# Altium PCB traffic_light_PCB - 1 layer.PcbDoc
Units mil, origin at the board's own origin, x right, y up, seen from the top; angles counter-clockwise.
Board outline 6000 x 4000 mil, 2 copper layers (Top Layer, Bottom Layer); 27 components, 45 nets, 189 pads, 0 vias.
Unrouted connection lines stored in the file: 3.
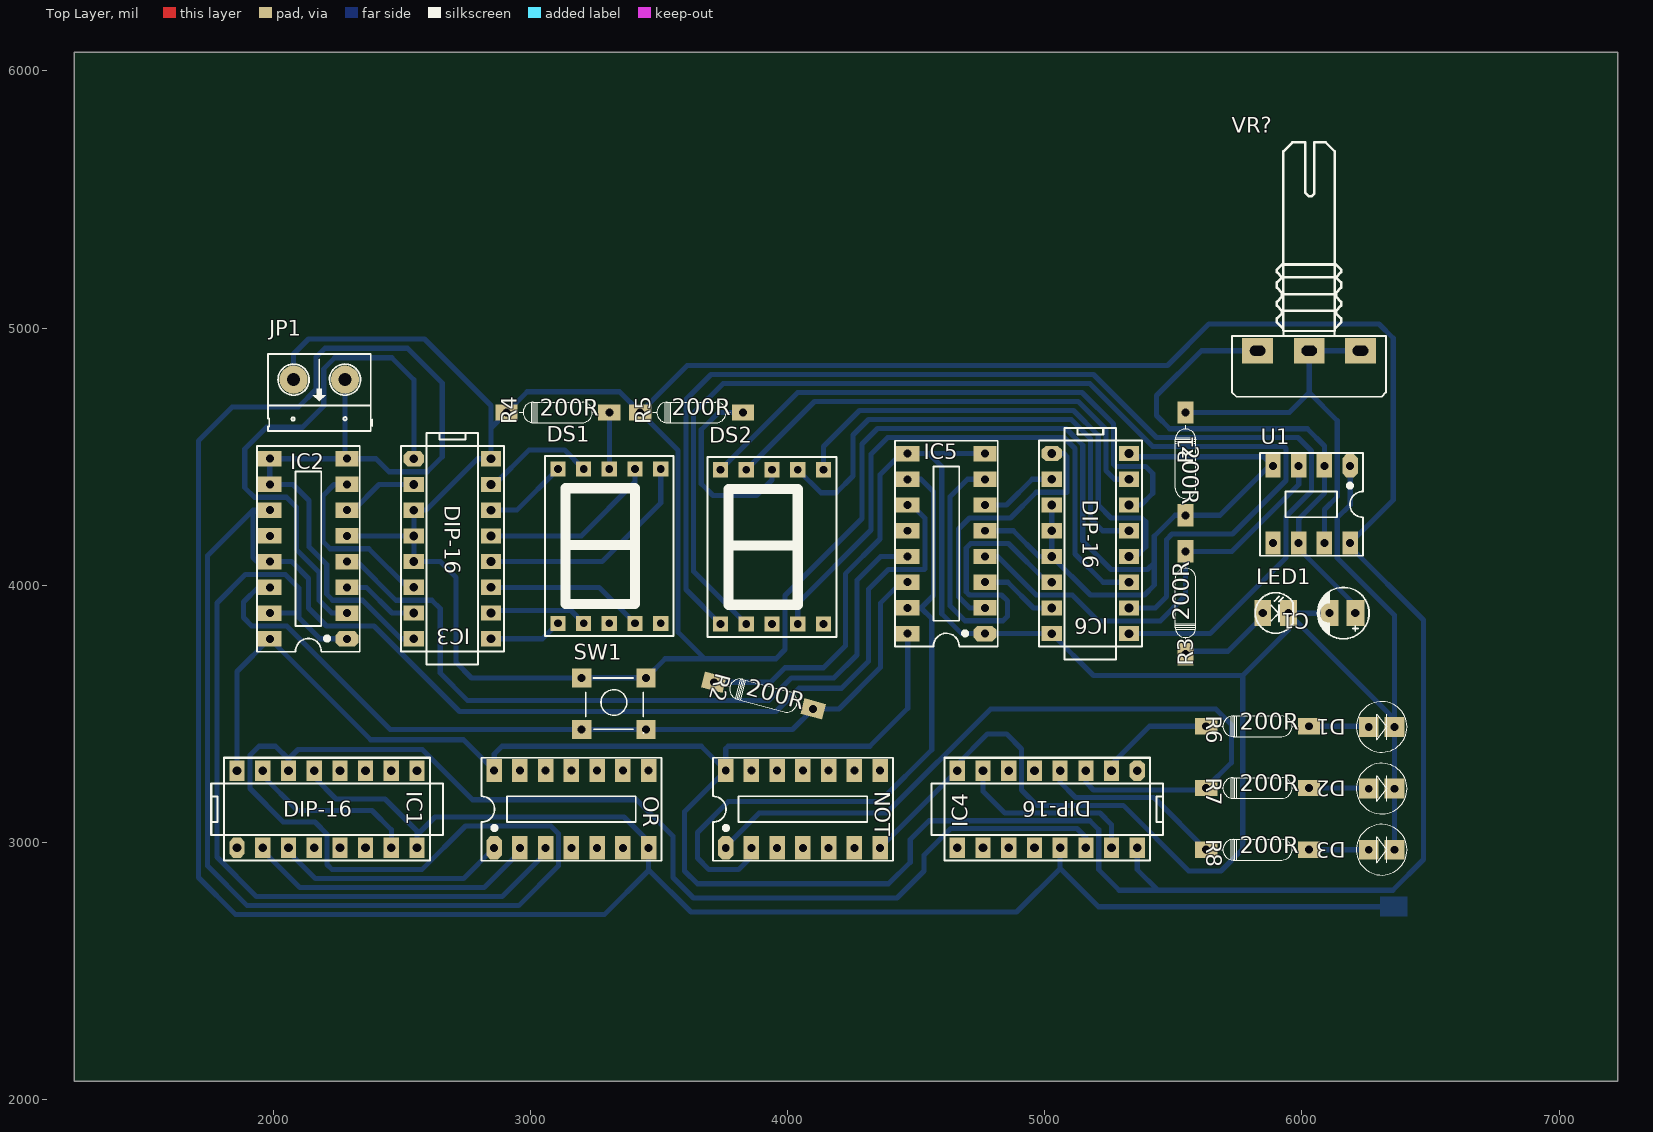
[diagram p0: Top Layer view]
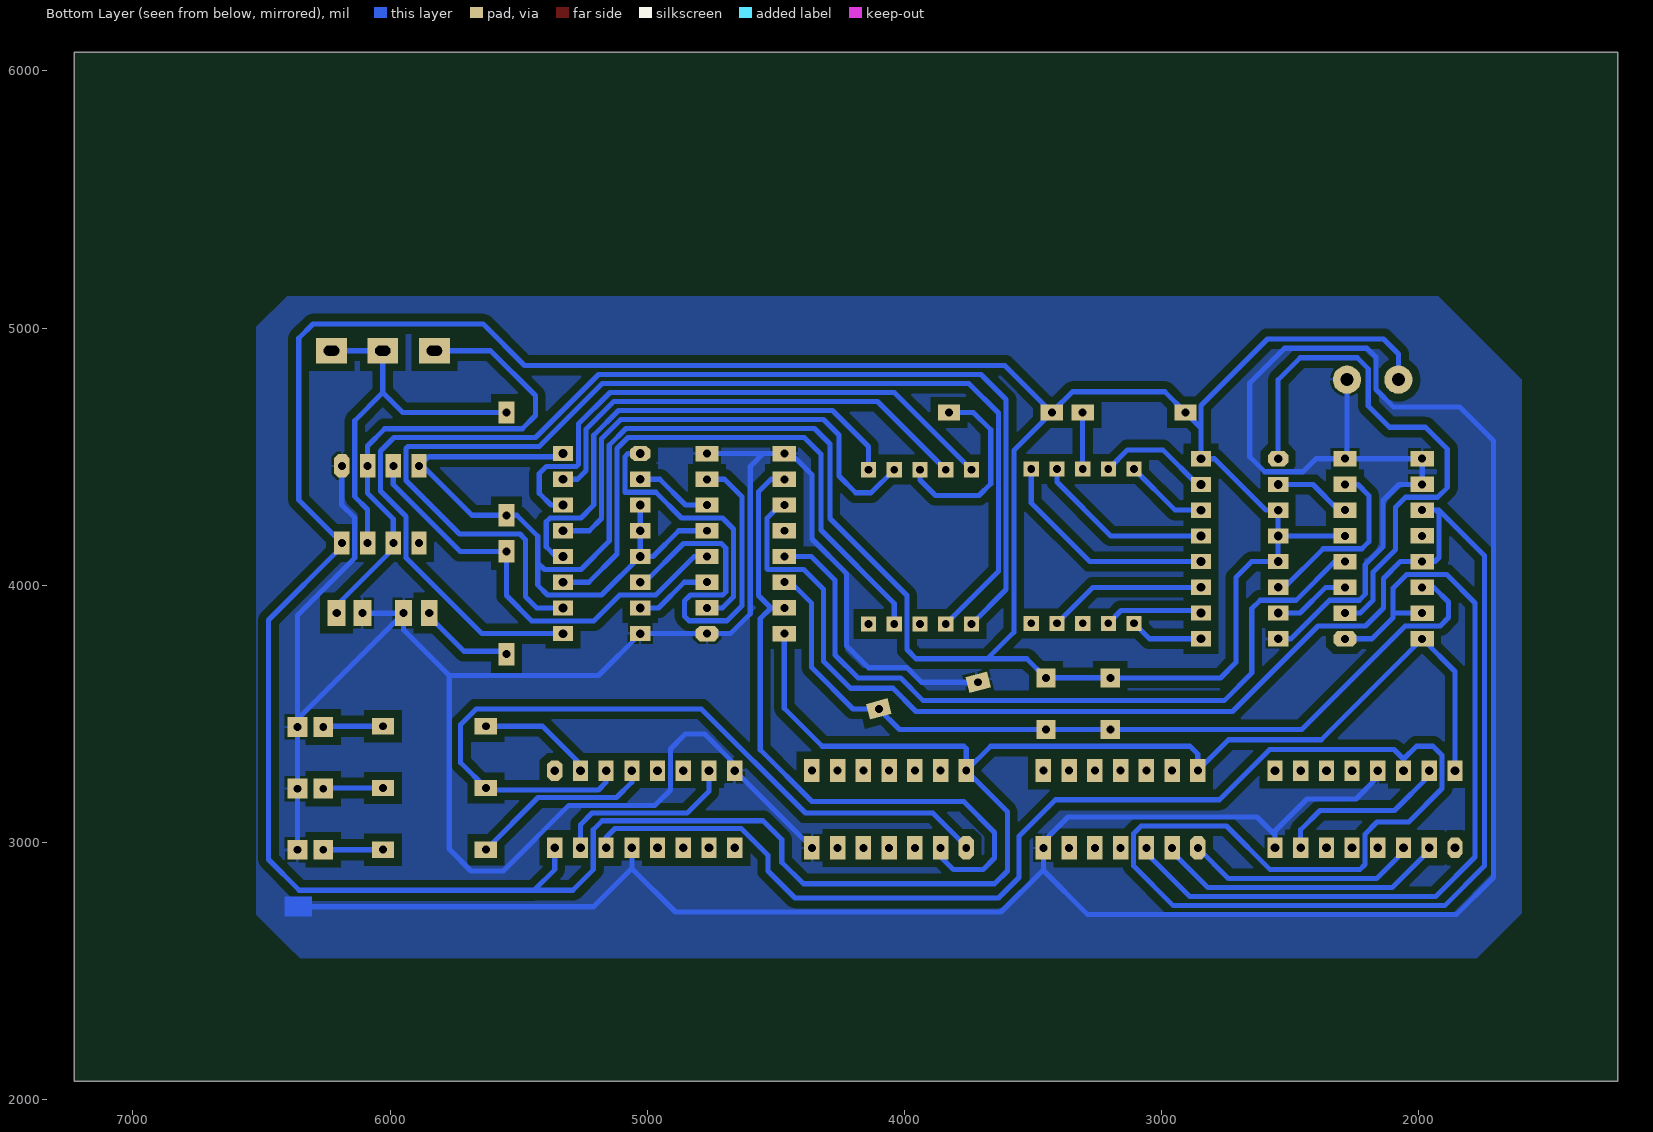
[diagram p1: Bottom Layer view, seen from below]
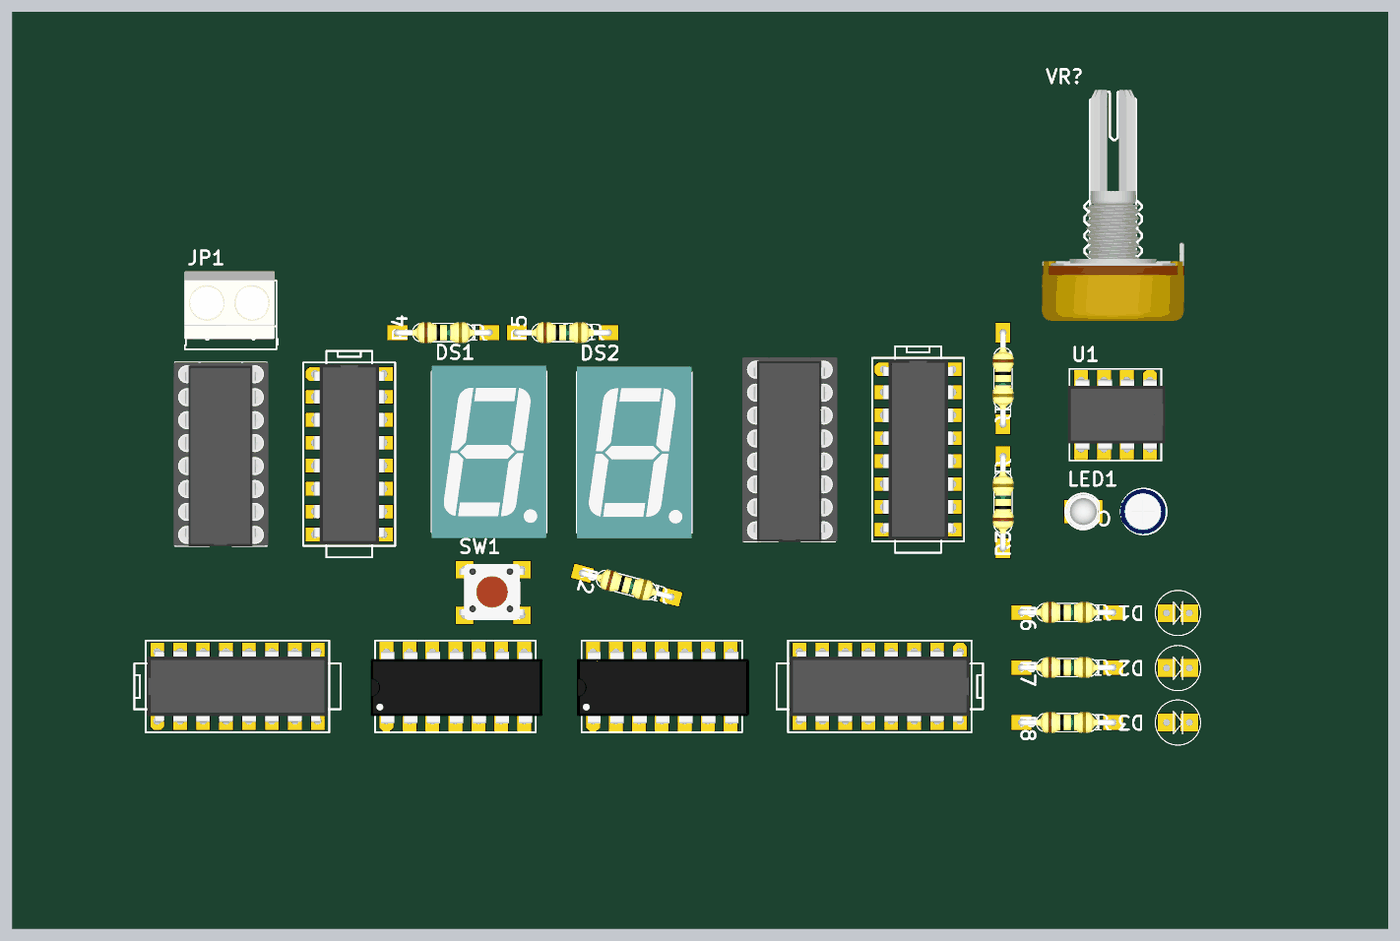
[diagram p2: 3D render of the assembled board from above, using the file's embedded part models]

## Layer stack, top to bottom
Top Solder: solder mask 0.4, Solder Resist, Dk 3.5
Top Layer: signal copper 1.4
Dielectric 1: dielectric 12.6, FR-4, Dk 4.8
Bottom Layer: signal copper 1.4
Bottom Solder: solder mask 0.4, Solder Resist, Dk 3.5

## Board outline
1227.5,2072.5 7227.5,2072.5 7227.5,6072.5 1227.5,6072.5

## Design rules (kind name [scope] priority, off if disabled: settings)
Clearance [All] p1: gap=10
PolygonConnect [All] p1: connectstyle=Relief reliefconductorwidth=10 reliefentries=4 polygonreliefangle="90 Angle" airgapwidth=10
RoutingLayers [All] p1: top layer_v5=FALSE bottom layer_v5=TRUE
RoutingVias [All] p1: holewidth=28 width=50 viastyle="Through Hole" minholewidth=28 minwidth=50 maxholewidth=28 maxwidth=50
SolderMaskExpansion [All] p1: expansion=4
Width [All] p1: maxlimit=30 minlimit=12 preferedwidth=20 toplayer_minwidth=20 minimp=50.000000 maximp=50.000000 favimp=50.000000
29 further rules are at their usual default settings.

## Components (designator, comment, footprint, x,y, rotation, side; value= is the part's Value field where it differs from the comment)
C1 "Cap Pol" CP1/2 6207.5,3892.5 r180 top
D1 "LED-RED-5MM" LED-5MM-RED 6260,3450 r0 top
D2 "LED-YELLOW-5MM" LED-5MM-YELLOW 6260,3210 r0 top
D3 "LED-GREEN-5MM" LED-5MM-GREEN 6260,2972.5 r0 top
DS1 "7SEG-A" LED7SEG 3306.5,4152.5 r0 top
DS2 "7SEG-A" LED7SEG 3939,4150 r0 top
IC1 "4017" DIP16 2210.29,3130.08 r0 top
IC2 "74193" DIP16/W0.3 2287.5,3792.5 r90 top
IC3 "7447" DIP16 2697.58,4142.21 r270 top
IC4 "4017" DIP16 5009.71,3129.92 r180 top
IC5 "74193" DIP16/W0.3 4767.5,3812.5 r90 top
IC6 "7447" DIP16 5177.58,4162.21 r270 top
JP1 "Header 2_1" HED2 2280,4800 r180 top
LED1 "LED" LED-3MM-WHITE 5847.5,3892.5 r0 top
NOT "7404" DIP14/W0.3 3760,2980 r0 top
OR "7432" DIP14/W0.3 2860,2980 r0 top
R1 "R0.4W" "DIEN TRO 1/4 W" 5547.5,4672.5 r270 top
R2 "R0.4W" "DIEN TRO 1/4 W" 3713.63,3623.53 r345 top
R3 "R0.4W" "DIEN TRO 1/4 W" 5547.5,3732.5 r90 top
R4 "R0.4W" "DIEN TRO 1/4 W" 2907.5,4672.5 r0 top
R5 "R0.4W" "DIEN TRO 1/4 W" 3427.5,4672.5 r0 top
R6 "R0.4W" "DIEN TRO 1/4 W" 5627.5,3452.5 r0 top
R7 "R0.4W" "DIEN TRO 1/4 W" 5627.5,3212.5 r0 top
R8 "R0.4W" "DIEN TRO 1/4 W" 5627.5,2972.5 r0 top
SW1 "SW" SW4 3200,3640 r0 top
U1 "NE555" DIP8 6042.5,4315 r180 top
VR? "50K" VR-S1 6027.5,4912.5 r180 top

## Footprints (in the part's own frame and the unit in brackets; to place one, negate y for a bottom-side part, rotate by r counter-clockwise, add the part's x,y. Pads: shape width x height; smd on the part's side, far side on the other; paste and mask are expansions set on the pad)
CP1/2 [mil] "Tu hoa < 22uF/16>50V"
  rect 70x100 hole 32: 1(0,0) 2(100,0)
  silkscreen extent -53,-100 147,100, body extent -49,-99 149,99, height 287
"DIEN TRO 1/4 W" [mm]
  rect 2.2x1.6 hole 0.787: 1(0,0) 2(10.16,0)
  silkscreen extent 1.26,-1.02 8.88,1.02, body extent -0.3,-1.16 10.46,1.16, height 2.93
DIP8 [mil] "DIP, 8-Leads, Row Spacing 7.62mm, Pitch 2.54mm, Body 9.91x6.73mm"
  oct 60x90 hole 31: 1(-145,-150)
  rect 60x90 hole 31: 2(-45,-150) 3(55,-150) 4(155,-150) 5(155,150) 6(55,150) 7(-45,150) 8(-145,150)
  silkscreen extent -195,-200 205,200, body extent -213,-153 213,153, height 177
DIP14/W0.3 [mil] "14PIN, W 300mil, Pin to pin 100mil"
  oct 60x90 hole 31: 1(0,0)
  rect 60x90 hole 31: 2(100,0) 3(200,0) 4(300,0) 5(400,0) 6(500,0) 7(600,0) 8(600,300) 9(500,300) 10(400,300) 11(300,300) 12(200,300) 13(100,300) 14(0,300)
  silkscreen extent -50,-50 650,350, body extent -70,-12 680,302, height 145
DIP16 [mm]
  oct 1.5x2 hole 0.864: 1(-8.897,-3.812)
  rect 1.5x2 hole 0.864: 2(-6.357,-3.812) 3(-3.817,-3.812) 4(-1.277,-3.812) 5(1.263,-3.812) 6(3.803,-3.812) 7(6.343,-3.812) 8(8.883,-3.812) 9(8.883,3.808) 10(6.343,3.808) 11(3.803,3.808) 12(1.263,3.808) 13(-1.277,3.808) 14(-3.817,3.808) 15(-6.357,3.808) 16(-8.897,3.808)
  silkscreen extent -11.44,-5.08 11.42,5.08, body extent -10,-3.93 10,3.94, height 1.99
DIP16/W0.3 [mil] "16 PIN, W 300mil, Pin to pin 100mil"
  oct 60x90 hole 31: 1(0,0)
  rect 60x90 hole 31: 2(100,0) 3(200,0) 4(300,0) 5(400,0) 6(500,0) 7(600,0) 8(700,0) 9(700,300) 10(600,300) 11(500,300) 12(400,300) 13(300,300) 14(200,300) 15(100,300) 16(0,300)
  silkscreen extent -50,-50 750,350, body extent -52,-57 752,356, height 299
HED2 [mil] "Header 2, 2 pin, hight 300mil, Pin to Pin 200, Colour Green"
  round 110 hole 50: 1(0,0) 2(200,0)
  silkscreen extent -106,-100 300,200, body extent -92,-140 302,155, height 394
LED7SEG [mil] "LED7SEG"
  round 60 on Top Overlay: 0(186,-210)
  rect 59.06x59.06 hole 30: 1(-199,-300) 2(-99,-300) 3(1,-300) 4(101,-300) 5(201,-300) 6(201,300) 7(101,300) 8(1,300) 9(-99,300) 10(-199,300)
  silkscreen extent -249,-350 251,350, body extent -250,-375 250,375, height 316
LED-3MM-WHITE [mil] "LED 2 PIN, 3ly Only colour"
  rect 65x100 hole 32: 1(0,0) 2(100,0)
  silkscreen extent -29,-78 118,79, body extent -25,-75 113,75, height 217
LED-5MM-GREEN [mil]
  rect 77x77 hole 30: A(0,0) K(100,0)
  silkscreen extent -48,-98 148,98, body extent -54,-105 155,105, height 370
LED-5MM-RED [mil]
  rect 77x77 hole 30: A(0,0) K(100,0)
  silkscreen extent -48,-98 148,98, body extent -54,-105 155,105, height 370
LED-5MM-YELLOW [mil]
  rect 77x77 hole 30: A(0,0) K(100,0)
  silkscreen extent -48,-98 148,98, body extent -54,-105 155,105, height 370
SW4 [mil] "SW button 4pin, 250 x250 mil"
  rect 75x75 hole 31: 1(0,0) 2(250,-200) 3(250,0) 4(0,-200)
  silkscreen extent 15,-215 240,0, body extent -36,-220 276,24, height 276
VR-S1 [mil]
  rect 120x100 hole 40 slot 60 at 0 deg: 1(-200,0) 2(-1,0) 3(200,0)
  silkscreen extent -299,-810 300,179, body extent -310,-818 310,188, height 839

## Part data
C1: "Polarized Capacitor (Radial)"
DS1 DS2: library part LED7SEG-A, "14.2 mm General Purpose Blue 7-Segment Display: CA, RH DP, Gray Surface"
IC1 IC4: "Decade Counter/Divider with 10 Decoded Outputs"
IC2 IC5: "Synchronous 4-Bit Up/Down Counter"
IC3 IC6: "BCD to 7-Segment Decoder/Driver"
JP1: "Header, 2-Pin"
LED1: "LED Single colour Green and Red"
NOT: "Hex Inverter"
OR: "Quad 2-Input OR Gate"
R1 R2 R3 R4 R5 R6 R7 R8: library part "Res 1/4 W", "Resistor"
SW1: library part SW4-1, "Switch button 4 pin"
U1: "TIMER IC"
VR?: library part VR-S, "Var Resistor"

## Nets (pads, with @x,y where several pads share a name; then routed paths per layer and width w, separated by ;. In a path a pad name is that pad's centre, name@x,y a point inside that pad or via, vN(x,y) a via of type N, cw(c..) or ccw(c..) an arc to the next point about the centre after c; other vN are vias at no path point)
GND: C1.2 D1.K D2.K D3.K IC1.8 IC1.13 IC2.8 IC2.9 IC2.10 IC3.8 IC4.8 IC4.13 IC5.1 IC5.8 IC5.9 IC6.8 JP1.1 LED1.2 NOT.7 OR.7 R2.1 U1.1 | length 20938
  Bottom Layer w20: IC1.13 2160,3255 2245,3170 2435,3170 2560,3045 2560,3030 ; JP1.1 IC2.8@2280,4492.5 ; IC3.8 2497.5,3792.5 2347.5,3942.5 2232.5,3942.5 2209,3966 2209,4081 2140,4150 2140,4330 2077.5,4392.5 IC2.10 IC2.9 IC2.8@2280,4492.5 ; IC1.8 2560,3030 ; R2.1 3933.53,3623.53 3990,3680 4140,3680 4225,3765 4225,4045 4360,4180 4360,4430 4442.5,4512.5 IC5.9 4550,4512.5 ; NOT.7 IC4.8 4660,3305 4777,3422 4852,3422 4910,3364 4910,3205 4970,3145 5305,3145 5560,2890 5685,2890 5770,2975 5770,3650 ; IC5.8 4550,4512.5 ; IC4.13 5060,2900 ; C1.2 6107.5,3892 LED1.2@5948,3892 ; U1.1 6187.5,4313 6137.5,4263 6137.5,4106.5 6360,3884 D1.K@6360,3480 ; 6322,2751 5209,2751 5060,2900 ; D3.K D2.K D1.K D1.K@6360,3480 ; IC2.8@2280,4492.5 IC2.8 2400.53,4492.5 2451,4442.03 2600,4442.03 2658,4500.03 2658,4787 2523,4922 2202,4922 2167,4887 2167,4762 2098,4693 1841,4693 1710,4562 1710,2865 1855,2720 3288,2720 3460,2892 3460,2895 ; 2560,3030 2630,3100 3365,3100 3460,3005 OR.7 3460,2895 ; 3460,2895 3625,2730 4890,2730 5060,2900 ; 4550,4512.5 4600,4462.5 4600,3890 4677.5,3812.5 IC5.1 IC6.8 5190,3650 5770,3650 ; 5770,3650 5947.5,3827.5 LED1.2 LED1.2@5948,3892 ; LED1.2@5948,3892 D1.K@6360,3480
NetC1_1: C1.1 U1.2 U1.6 VR?.3 | length 2032.4
  Bottom Layer w20: VR?.3 5609.5,4912.5 5435,4738 5435,4660 5486,4609 6021,4609 6087.5,4542.5 U1.2 6087.5,4358.64 5987.5,4258.64 U1.6 5987.5,4142.5 6197.5,3932.5 6207.5,3932.5 C1.1
NetD1_A: D1.A R6.2 | length 232.5
  Bottom Layer w20: R6.2 D1.A@6260,3452.5
NetD2_A: D2.A R7.2 | length 232.5
  Bottom Layer w20: R7.2 D2.A@6260,3212.5
NetD3_A: D3.A R8.2 | length 232.5
  Bottom Layer w20: R8.2 D3.A
NetDS1_1: DS1.1 IC3.9 | length 284.9
  Bottom Layer w20: IC3.9 3047.5,3792.5 DS1.1
NetDS1_2: DS1.2 IC3.10 | length 390
  Bottom Layer w20: IC3.10 2847.5,3902.03 3157.97,3902.03 DS1.2
NetDS1_3: DS1.3 DS1.8 R4.2 | length 220
  Bottom Layer w20: DS1.8 R4.2
NetDS1_4: DS1.4 IC3.11 | length 618
  Bottom Layer w20: IC3.11 3267.5,3992.5 DS1.4
NetDS1_6: DS1.6 IC3.12 | length 886.5
  Bottom Layer w20: IC3.12 3279.53,4092.5 3507.5,4320.47 DS1.6
NetDS1_7: DS1.7 IC3.13 | length 697.6
  Bottom Layer w20: IC3.13 3198.5,4192.5 3407.5,4401.5 DS1.7
NetDS1_9: DS1.9 IC3.15 | length 446.6
  Bottom Layer w20: IC3.15 2861.5,4392.5 2996,4527 3133,4527 DS1.9
NetDS1_10: DS1.10 IC3.14 | length 326.3
  Bottom Layer w20: IC3.14 2947.5,4292.5 DS1.10
NetDS2_1: DS2.1 IC6.9 | length 4712.6
  Bottom Layer w20: DS2.1@3739,3850 3605,3984.01 3605,4722.32 3702.68,4820 5190,4820 5435,4575 5985,4575 6037.5,4522.5 6037.5,4367.5 5937.5,4267.5 5937.5,4107.5 5642.5,3812.5 IC6.9
NetDS2_2: DS2.2 IC6.10 | length 4432.9
  Bottom Layer w20: DS2.2@3845,3855 3835,3855 3635,4055 3635,4670 3750,4785 5175,4785 5420,4540 5930,4540 5937.5,4532.5 5937.5,4407.5 5730,4200 5495,4200 5474,4179 5474,3956.5 5430,3912.5 IC6.10
NetDS2_3: DS2.3 DS2.8 R5.2 | length 759
  Bottom Layer w20: R5.2 3732.5,4672.5 3665,4605 3665,4395 3710,4350 3880,4350 3940,4410 DS2.8
NetDS2_4: DS2.4 IC6.11 | length 2280.6
  Bottom Layer w20: DS2.4 4040,3930 4325,4215 4325,4510 4390,4575 5075,4575 5117.86,4532.14 5117.86,4122.14 5227.5,4012.5 IC6.11
NetDS2_6: DS2.6 IC6.12 | length 1917
  Bottom Layer w20: DS2.6 4140,4540 4280,4680 5112,4680 5207.86,4584.14 5207.86,4312.14 5257.5,4262.5 5377.5,4262.5 5392.5,4247.5 5392.5,4150 5355,4112.5 IC6.12
NetDS2_7: DS2.7 IC6.13 | length 1897.2
  Bottom Layer w20: DS2.7 4130,4360 4190,4360 4255,4425 4255,4585 4315,4645 4405,4645 5103,4645 5177.86,4570.14 5177.86,4260.3 5225.66,4212.5 IC6.13
NetDS2_9: DS2.9 IC6.15 | length 1836.9
  Bottom Layer w20: DS2.9@3860,4450 3840,4470 3860,4470 4105,4715 5130,4715 5237.86,4607.14 5237.86,4446.14 5271.5,4412.5 IC6.15
NetDS2_10: DS2.10 IC6.14 | length 2215.3
  Bottom Layer w20: DS2.10 4040,4750 5145,4750 5268,4627 5268,4469.5 5274.53,4462.97 5392.03,4462.97 5420,4435 5420,4358 5374.5,4312.5 IC6.14
NetIC1_2: IC1.2 OR.2 | length 1143.1
  Bottom Layer w20: IC1.2 1960,2970 2105,2825 2820,2825 2960,2965 OR.2
NetIC1_3: IC1.3 OR.1 | length 908.2
  Bottom Layer w20: IC1.3 2060,2965 2165,2860 2740,2860 OR.1
NetIC1_7: IC1.7 IC1.15 | length 677
  Bottom Layer w20: IC1.15 1960,3260 2095,3125 2385,3125 2460,3050 IC1.7
NetIC1_14: IC1.14 IC2.11 IC2.13 IC4.14 IC5.11 | length 12428.8
  Bottom Layer w20: IC2.11 1934,4292.5 ; IC1.14 2060,3325 ; IC5.11 4483.5,4312.5 4535,4261 4535,4065 4532.5,4062.5 4392.5,4062.5 4315,3985 4315,3705 4210,3600 4045,3600 3955,3510 2725,3510 2392.5,3842.5 2207.5,3842.5 2138,3912 2138,4027 2072.5,4092.5 IC2.13 1937.5,4092.5 1921.97,4108.03 1921.97,4280.47 1934,4292.5 ; IC4.14 5160,3020 5125,3055 4635,3055 4531,2951 4531,2890 4426,2785 3635,2785 3555,2865 3555,3025 3413,3167 2775,3167 2580,3362 2097,3362 2060,3325 ; 1934,4292.5 1922,4292.5 1745,4115.5 1745,2910 1900,2755 2955,2755 3110,2910 3110,3035 3080,3065 2748,3065 2578,2895 2230,2895 2210,2915 2210,3033 2163,3080 2040,3080 1910,3210 1910,3340 1945,3375 2010,3375 2060,3325
NetIC2_1: IC2.1 IC2.15 OR.3 | length 3255.9
  Bottom Layer w20: IC2.15 2101,3892.5 ; IC2.1 2182.5,3792.5 2101,3874 2101,3892.5 ; OR.3 3060,2960 2890,2790 1936,2790 1781.96,2944.04 1781.96,3931.96 1892.5,4042.5 2047.5,4042.5 2101,3989 2101,3892.5
NetIC2_2: IC2.2 IC3.1 | length 2142.1
  Bottom Layer w20: IC2.2 2228,3892.5 2178.5,3942 2178.5,4051.5 2091,4139 2091,4304 2052.5,4342.5 1927.5,4342.5 1890,4380 1890,4530 1975,4615 2115,4615 2197,4697 2197,4842 2240,4885 2462,4885 2547.5,4799.5 IC3.1
NetIC2_3: IC2.3 IC3.7 | length 301.4
  Bottom Layer w20: IC2.3 2362.5,3992.5 2462.5,3892.5 IC3.7
NetIC2_4: IC2.4 IC5.13 | length 2953
  Bottom Layer w20: IC2.4 2327.5,4092.5 2477.5,3942.5 2617.5,3942.5 2650,3910 2650,3659 2757,3552 3927,3552 4015,3640 4180,3640 4270,3730 4270,4020 4362.5,4112.5 IC5.13
NetIC2_6: IC2.6 IC3.2 | length 301.4
  Bottom Layer w20: IC2.6 2312.5,4292.5 2412.5,4392.5 IC3.2
NetIC2_7: IC2.7 IC3.6 | length 716.1
  Bottom Layer w20: IC2.7 2237.5,4392.5 2195,4350 2195,4170 2222.5,4142.5 2372.5,4142.5 2522.5,3992.5 IC3.6
NetIC4_2: IC4.2 R6.1 | length 453.6
  Bottom Layer w20: IC4.2 5260,3305 5407.5,3452.5 R6.1
NetIC4_3: IC4.3 NOT.1 R7.1 | length 3039.9
  Bottom Layer w20: NOT.1 3755,2980 3890,3115 4385,3115 4790,3520 5285,3520 5665,3520 5725.5,3459.5 5725.5,3310.5 R7.1 5620,3205 5190,3205 5160,3235 IC4.3
NetIC4_4: IC4.4 R8.1 | length 721.2
  Bottom Layer w20: IC4.4 5060,3235 5120,3175 5425,3175 R8.1
NetIC4_7: IC4.7 IC4.15 | length 723.8
  Bottom Layer w20: IC4.7 4760,3200 4845,3115 5215,3115 5260,3070 IC4.15
NetIC5_2: IC5.2 IC6.1 | length 1067.9
  Bottom Layer w20: IC5.2 4708.25,3912.5 4665,3955.75 4665,4219.5 4708,4262.5 4867.5,4262.5 4967.03,4362.03 5087,4362.03 5087,4500 5074.5,4512.5 IC6.1
NetIC5_3: IC5.3 IC6.7 | length 301.4
  Bottom Layer w20: IC5.3 4856.5,4012.5 4956.5,3912.5 IC6.7
NetIC5_6: IC5.6 IC6.2 | length 301.4
  Bottom Layer w20: IC5.6 4851.79,4312.5 4951.79,4412.5 IC6.2
NetIC5_7: IC5.7 IC6.6 | length 1648
  Bottom Layer w20: IC5.7 4700,4412.5 4632,4344.5 4632,3921 4690.5,3862.5 4837.5,3862.5 4855,3880 4855,3940 4832.5,3962.5 4707.5,3962.5 4695,3975 4695,4145 4712.5,4162.5 4859.5,4162.5 5009.5,4012.5 IC6.6
NetIC5_10: IC5.10 IC5.15 NOT.2 | length 2635.8
  Bottom Layer w20: NOT.2@3860,2975 3860,2945 3810,2895 3695,2895 3650,2940 3650,3040 3770,3160 4360,3160 4561,3361 4561,3871 4519.5,3912.5 ; IC5.15 4519.5,3912.5 ; IC5.10 4519.5,4412.5 4567.5,4364.5 4567.5,3960.5 4519.5,3912.5
NetLED1_1: LED1.1 R3.1 | length 380.9
  Bottom Layer w20: R3.1 5547.5,3744 5712.5,3744 5847.5,3879 LED1.1
NetR1_1: R1.1 U1.7 VR?.1 VR?.2 | length 1641.2
  Bottom Layer w20: R1.1 5951,4672.5 6028,4749.5 ; 6087.5,4212.5 6087.5,4295 6137.5,4345 6137.5,4640 6028,4749.5 ; VR?.1 VR?.2 ; 6028,4749.5 6028.5,4750 VR?.2 ; 6028,4749.5 6028,4912.5 VR?.2
RST: IC2.14 IC5.14 R2.2 SW1.2 SW1.4 | length 3332.6
  Bottom Layer w20: IC2.14 1942.5,3992.5 1885,3935 1885,3875 1917.5,3842.5 2053.5,3842.5 2456,3440 SW1.4 SW1.2 4020,3440 R2.2 4200,3520 4361,3681 4361,3931 4442.5,4012.5 IC5.14
VCC: IC1.16 IC2.5 IC2.16 IC3.3 IC3.4 IC3.5 IC3.16 IC4.16 IC5.5 IC5.16 IC6.3 IC6.4 IC6.5 IC6.16 JP1.2 NOT.14 OR.14 R1.2 R4.1 R5.1 SW1.1 SW1.3 U1.4 U1.8 | length 23612
  Bottom Layer w20: IC1.16 1860,3665 IC2.16 2380,3400 2740,3400 OR.14 2860,3345 2890,3375 3665,3375 NOT.14 ; JP1.2 2080,4900 2138,4958 2589,4958 2847.5,4699.5 2847.5,4612.5 ; IC2.5 IC3.4 ; R5.1@3422.5,4677.5 3347,4753 2988,4753 R4.1 2847.5,4612.5 ; R5.1@3458,4672.5 R5.1 ; IC5.16 4467.5,3522.5 4320,3375 3770,3375 3760,3365 NOT.14 ; IC5.5 4877.5,4212.5 4977.5,4112.5 IC6.5 ; IC6.3 IC6.4 IC6.5 ; IC6.16 5340,4500 5850,4500 5871.5,4478.5 5887.5,4478.5 5681.5,4272.5 R1.2 5507.5,4272.5 5426,4191 5426,4088.03 ; IC4.16 5360,2895 5440,2815 ; IC3.4 IC3.3 2594.5,4292.5 2794.5,4492.5 IC3.16 2847.5,4612.5 ; IC3.4 IC3.5 2650,4092.5 2712,4030.5 2712,3700 2772,3640 SW1.1 3201,3641 3449,3641 SW1.3 3525,3715 3678,3715 ; R5.1 3575,4525 3575,3818 3678,3715 ; R5.1 3610,4855 5477,4855 5638,5016 6300,5016 6355,4961 6355,4332.5 U1.8 6187.5,4150 6472,3865.5 6472,2934 6353,2815 5440,2815 ; 3678,3715 3955,3715 3990.47,3750.47 3990.47,3960.47 4290,4260 4290,4550 4350,4610 5082.86,4610 5147.86,4545 5147.86,4172.14 5257.97,4062.03 5400,4062.03 5426,4088.03 ; NOT.14 3600,3120 3600,2890 3650,2840 4393,2840 4477,2924 4477,3012 4550,3085 5175,3085 5210,3050 5210,2895 5290,2815 5440,2815 ; IC6.5 5177.5,3962.5 5387.5,3962.5 5426,4001 5426,4088.03
ZZZ: IC5.4 R3.2 U1.3 | length 1717.2
  Bottom Layer w20: IC5.4 4817.5,4112.5 4967.03,3962.97 5107.03,3962.97 5207.97,3862.03 5449,3862.03 5547.5,3960.53 R3.2@5547.5,4132 ; R3.2 R3.2@5547.5,4132 ; U1.3 5987.5,4392 5727.5,4132 R3.2@5547.5,4132
pads on no net: DS1.0 DS1.5 DS2.0 DS2.5 IC1.1 IC1.4 IC1.5 IC1.6 IC1.9 IC1.10 IC1.11 IC1.12 IC2.12 IC4.1 IC4.5 IC4.6 IC4.9 IC4.10 IC4.11 IC4.12 IC5.12 NOT.3 NOT.4 NOT.5 NOT.6 NOT.8 NOT.9 NOT.10 NOT.11 NOT.12 NOT.13 OR.4 OR.5 OR.6 OR.8 OR.9 OR.10 OR.11 OR.12 OR.13 U1.5

## Polygon pours and split planes (outlines as drawn)
GND on Bottom Layer "GND_L02_P006" (solid, pour order 6): 6400,5125 6520,5005 6520,2800 6520,2720 6400,2600 6350,2550 1850,2550 1775,2550 1600,2725 1600,4650 1600,4800 1925,5125

## Other copper
Bottom Layer:
  rectangle net GND: 6304,2713 6410,2791

## Text inside footprints (layer, text, board x,y; h text height)
IC1: Top Overlay "DIP-16" at 2040,3100 h59.05
IC3: Top Overlay "DIP-16" at 2667.5,4312.5 h59.05 r270
IC4: Top Overlay "DIP-16" at 5180,3160 h59.05 r180
IC6: Top Overlay "DIP-16" at 5147.5,4332.5 h59.05 r270
R1: Top Overlay "200R" at 5512.5,4542.5 h110.24 r270
R2: Top Overlay "200R" at 3830.14,3556.07 h110.24 r345
R3: Top Overlay "200R" at 5582.5,3862.5 h110.24 r90
R4: Top Overlay "200R" at 3037.5,4637.5 h110.24
R5: Top Overlay "200R" at 3550,4640 h110.24
R6: Top Overlay "200R" at 5757.5,3417.5 h110.24
R7: Top Overlay "200R" at 5757.5,3177.5 h110.24
R8: Top Overlay "200R" at 5757.5,2937.5 h110.24